# EAGLE board Micro_Bit_Moto_Bit_Panel_v10 (EAGLE 7.5.0), part 1 of 2
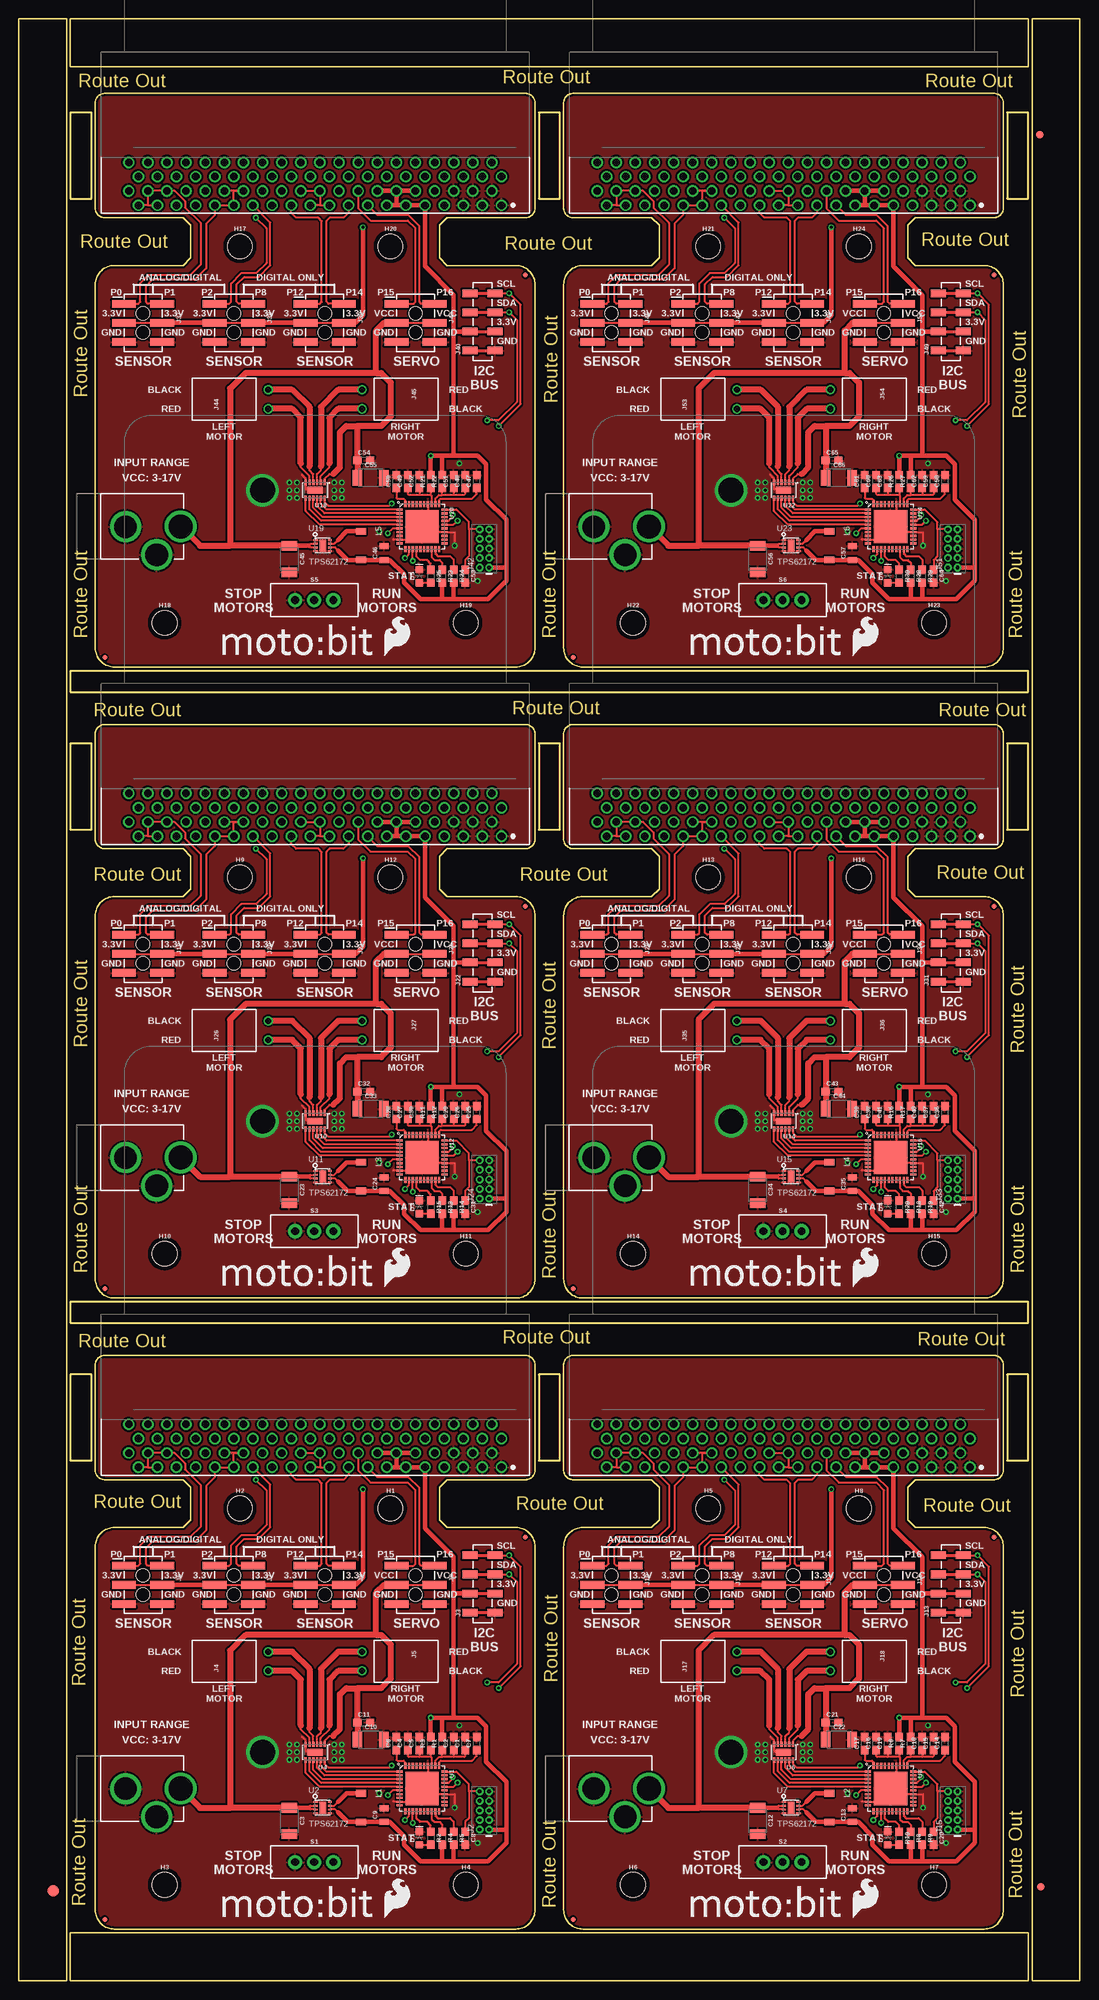
[diagram p0: board, top side]
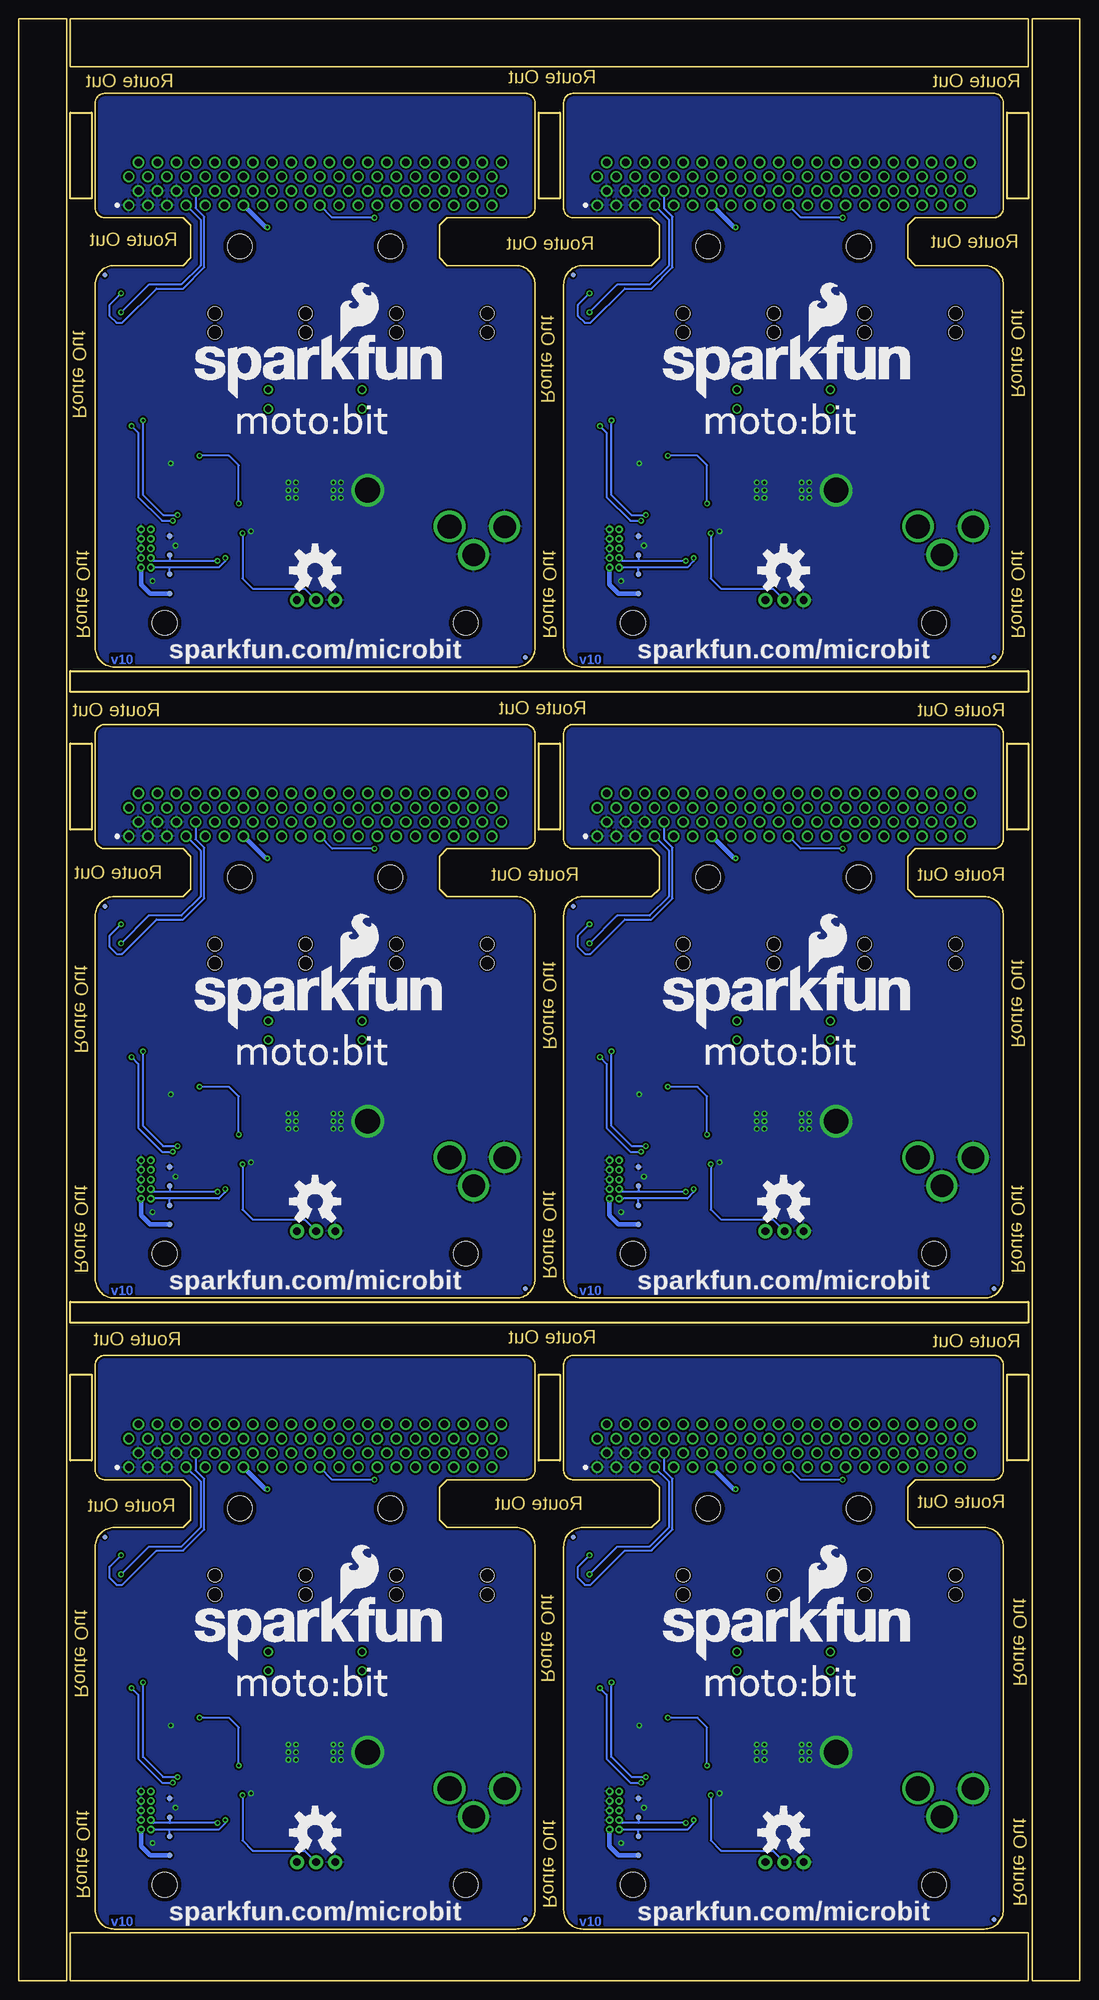
[diagram p1: board, bottom side, seen from below]

Size 140.97 x 260.6 mm. Coordinates in mm from the lower left corner, seen from the top.
Outline: 6.35,124.97 6.35,0 0,0 0,75.44
Outline: 0,72.9 0,260.6 6.35,260.6 6.35,122.43
Outline: 81.28,0 6.86,0 6.86,6.35 31.75,6.35
Outline: 29.21,6.35 134.11,6.35 134.11,0 78.74,0
Outline: 140.97,117.09 140.97,0 134.62,0 134.62,67.56
Outline: 134.62,65.02 134.62,260.6 140.97,260.6 140.97,114.55
Outline: 27.18,260.6 134.11,260.6 134.11,254.25 76.71,254.25
Outline: 79.25,254.25 6.86,254.25 6.86,260.6 29.72,260.6
Outline: 12.7,6.86 66.04,6.86 arc90 68.58,9.4 68.58,57.66 arc90 66.04,60.2 56.9,60.2 55.88,61.21 55.88,65.53 56.9,66.55 67.31,66.55 arc90 68.58,67.82 68.58,81.79 arc90 67.31,83.06 11.43,83.06 arc90 10.16,81.79 10.16,67.82 arc90 11.43,66.55 21.84,66.55 22.86,65.53 22.86,61.21 21.84,60.2 12.7,60.2 arc90 10.16,57.66 10.16,9.4 arc90 12.7,6.86
Outline: 74.93,6.86 128.27,6.86 arc90 130.81,9.4 130.81,57.66 arc90 128.27,60.2 119.13,60.2 118.11,61.21 118.11,65.53 119.13,66.55 129.54,66.55 arc90 130.81,67.82 130.81,81.79 arc90 129.54,83.06 73.66,83.06 arc90 72.39,81.79 72.39,67.82 arc90 73.66,66.55 84.07,66.55 85.09,65.53 85.09,61.21 84.07,60.2 74.93,60.2 arc90 72.39,57.66 72.39,9.4 arc90 74.93,6.86
Outline: 69.09,69.09 71.88,69.09 71.88,80.52 69.09,80.52 69.09,69.09
Outline: 131.32,69.09 134.11,69.09 134.11,80.52 131.32,80.52 131.32,69.09
Outline: 6.86,69.09 9.65,69.09 9.65,80.52 6.86,80.52 6.86,69.09
Outline: 6.86,90.17 6.86,87.38 134.11,87.38 134.11,90.17 6.86,90.17
Outline: 12.7,90.68 66.04,90.68 arc90 68.58,93.22 68.58,141.48 arc90 66.04,144.02 56.9,144.02 55.88,145.03 55.88,149.35 56.9,150.37 67.31,150.37 arc90 68.58,151.64 68.58,165.61 arc90 67.31,166.88 11.43,166.88 arc90 10.16,165.61 10.16,151.64 arc90 11.43,150.37 21.84,150.37 22.86,149.35 22.86,145.03 21.84,144.02 12.7,144.02 arc90 10.16,141.48 10.16,93.22 arc90 12.7,90.68
Outline: 74.93,90.68 128.27,90.68 arc90 130.81,93.22 130.81,141.48 arc90 128.27,144.02 119.13,144.02 118.11,145.03 118.11,149.35 119.13,150.37 129.54,150.37 arc90 130.81,151.64 130.81,165.61 arc90 129.54,166.88 73.66,166.88 arc90 72.39,165.61 72.39,151.64 arc90 73.66,150.37 84.07,150.37 85.09,149.35 85.09,145.03 84.07,144.02 74.93,144.02 arc90 72.39,141.48 72.39,93.22 arc90 74.93,90.68
Outline: 69.09,152.91 71.88,152.91 71.88,164.34 69.09,164.34 69.09,152.91
Outline: 131.32,152.91 134.11,152.91 134.11,164.34 131.32,164.34 131.32,152.91
Outline: 6.86,152.91 9.65,152.91 9.65,164.34 6.86,164.34 6.86,152.91
Outline: 6.86,173.99 6.86,171.2 134.11,171.2 134.11,173.99 6.86,173.99
Outline: 12.7,174.5 66.04,174.5 arc90 68.58,177.04 68.58,225.3 arc90 66.04,227.84 56.9,227.84 55.88,228.85 55.88,233.17 56.9,234.19 67.31,234.19 arc90 68.58,235.46 68.58,249.43 arc90 67.31,250.7 11.43,250.7 arc90 10.16,249.43 10.16,235.46 arc90 11.43,234.19 21.84,234.19 22.86,233.17 22.86,228.85 21.84,227.84 12.7,227.84 arc90 10.16,225.3 10.16,177.04 arc90 12.7,174.5
Outline: 74.93,174.5 128.27,174.5 arc90 130.81,177.04 130.81,225.3 arc90 128.27,227.84 119.13,227.84 118.11,228.85 118.11,233.17 119.13,234.19 129.54,234.19 arc90 130.81,235.46 130.81,249.43 arc90 129.54,250.7 73.66,250.7 arc90 72.39,249.43 72.39,235.46 arc90 73.66,234.19 84.07,234.19 85.09,233.17 85.09,228.85 84.07,227.84 74.93,227.84 arc90 72.39,225.3 72.39,177.04 arc90 74.93,174.5
Outline: 69.09,236.73 71.88,236.73 71.88,248.16 69.09,248.16 69.09,236.73
Outline: 131.32,236.73 134.11,236.73 134.11,248.16 131.32,248.16 131.32,236.73
Outline: 6.86,236.73 9.65,236.73 9.65,248.16 6.86,248.16 6.86,236.73
Copper layers (1*16): Top 0.035mm / dielectric 1.5mm / Bottom 0.035mm
Design rules "SparkFun-2-layer-TIGHT": minimum track width 7mil, minimum drill 15mil, track to track 7mil, track to pad 7mil, pad to pad 7mil, via to via 7mil, smd to smd 7mil, copper to edge 7mil, drill to drill 7mil, minimum pad ring 7mil, minimum via ring 7mil, stop-mask expansion 4mil, vias tented up to drill 25mil, thermal gap 10mil

## Footprints (pad centres in the part's own frame; a part is rotated, then mirrored left to right if it is on the bottom)
0603 = smd 1.1 x 1: 1 -0.85,0; 2 0.85,0
1210 = smd 1.27 x 2.06: 1 -1.755,0; 2 1.755,0
0805 = smd 0.8 x 1.2: 1 -0.9,0; 2 0.9,0
LED-0603 = smd 1 x 1: A -0.877,0; C 0.877,0
FIDUCIAL-1.5X3 = smd 1.5 x 1.5: 1 0,0
FIDUCIAL-1X2 = smd 1 x 1: 1 0,0
FIDUCIAL-MICRO = smd 0.635 x 0.635: 1 0,0
STAND-OFF = hole 3.302: 0,0
POWER_JACK_PTH_LOCK = drill 2.997 pad 4.115: GND 0.025,6.557; GNDBREAK 3.762,10.7 | drill 3.2 pad 4.115: PWR 0,13.878
2X5-PTH-1.27MM = drill 0.508 pad 1: 1 -2.54,-0.635; 2 -2.54,0.635; 3 -1.27,-0.635; 4 -1.27,0.635; 5 0,-0.635; 6 0,0.635; 7 1.27,-0.635; 8 1.27,0.635; 9 2.54,-0.635; 10 2.54,0.635
1X04_SMD_VERTICAL_COMBO = smd 1 x 2: 1 0,-1.65; 1-2 0,1.65; 2 2.54,1.65; 2-2 2.54,-1.65; 3 5.08,-1.65; 3-2 5.08,1.65; 4 7.62,1.65; 4-2 7.62,-1.65
1X02_RA_FEMALE = drill 0.8: 1 1.27,-5.85; 2 -1.27,-5.85
2X3_SMT_POSTS = smd 1 x 3.17: 1 -2.54,-2.54; 2 -2.54,2.54; 3 0,-2.54; 4 0,2.54; 5 2.54,-2.54; 6 2.54,2.54 | hole 1.8: -1.27,0; 1.27,0
INDUCTOR_2.2UH = smd 0.9 x 1.3: P$1 -1.9,0; P$2 1.9,0
SWITCH_SPDT_PTH_11.6X4.0MM = drill 1.016 pad 1.88: 1 0,2.54; 2 0,0; 3 0,-2.54
PAD.03X.03 = smd 0.762 x 0.762: P$1 0,0
QFN-40 = smd 0.285 x 0.8: 1 -2.25,-3; 2 -1.75,-3; 3 -1.25,-3; 4 -0.75,-3; 5 -0.25,-3; 6 0.25,-3; 7 0.75,-3; 8 1.25,-3; 9 1.75,-3; 10 2.25,-3; 21 2.25,3; 22 1.75,3; 23 1.25,3; 24 0.75,3; 25 0.25,3; 26 -0.25,3; 27 -0.75,3; 28 -1.25,3; 29 -1.75,3; 30 -2.25,3 | smd 0.8 x 0.285: 11 3,-2.25; 12 3,-1.75; 13 3,-1.25; 14 3,-0.75; 15 3,-0.25; 16 3,0.25; 17 3,0.75; 18 3,1.25; 19 3,1.75; 20 3,2.25; 31 -3,2.25; 32 -3,1.75; 33 -3,1.25; 34 -3,0.75; 35 -3,0.25; 36 -3,-0.25; 37 -3,-0.75; 38 -3,-1.25; 39 -3,-1.75; 40 -3,-2.25 | smd 4.4 x 4.4: EP 0,0
WSON-8-PAD = smd 0.25 x 0.5: 1 -0.75,-0.95; 2 -0.25,-0.95; 3 0.25,-0.95; 4 0.75,-0.95; 5 0.75,0.95; 6 0.25,0.95; 7 -0.25,0.95; 8 -0.75,0.95 | smd 1.6 x 0.9: PAD 0,0
MICRO:BIT_RA_PTH = drill 1: A1 -24.765,7.62; A2 -23.495,5.72; A3 -22.225,7.62; A4 -20.955,5.72; A5 -19.685,7.62; A6 -18.415,5.72; A7 -17.145,7.62; A8 -15.875,5.72; A9 -14.605,7.62; A10 -13.335,5.72; A11 -12.065,7.62; A12 -10.795,5.72; A13 -9.525,7.62; A14 -8.255,5.72; A15 -6.985,7.62; A16 -5.715,5.72; A17 -4.445,7.62; A18 -3.175,5.72; A19 -1.905,7.62; A20 -0.635,5.72; A21 0.635,7.62; A22 1.905,5.72; A23 3.175,7.62; A24 4.445,5.72; A25 5.715,7.62; A26 6.985,5.72; A27 8.255,7.62; A28 9.525,5.72; A29 10.795,7.62; A30 12.065,5.72; A31 13.335,7.62; A32 14.605,5.72; A33 15.875,7.62; A34 17.145,5.72; A35 18.415,7.62; A36 19.685,5.72; A37 20.955,7.62; A38 22.225,5.72; A39 23.495,7.62; A40 24.765,5.72; B1 -24.765,3.82; B2 -23.495,1.92; B3 -22.225,3.82; B4 -20.955,1.92; B5 -19.685,3.82; B6 -18.415,1.92; B7 -17.145,3.82; B8 -15.875,1.92; B9 -14.605,3.82; B10 -13.335,1.92; B11 -12.065,3.82; B12 -10.795,1.92; B13 -9.525,3.82; B14 -8.255,1.92; B15 -6.985,3.82; B16 -5.715,1.92; B17 -4.445,3.82; B18 -3.175,1.92; B19 -1.905,3.82; B20 -0.635,1.92; B21 0.635,3.82; B22 1.905,1.92; B23 3.175,3.82; B24 4.445,1.92; B25 5.715,3.82; B26 6.985,1.92; B27 8.255,3.82; B28 9.525,1.92; B29 10.795,3.82; B30 12.065,1.92; B31 13.335,3.82; B32 14.605,1.92; B33 15.875,3.82; B34 17.145,1.92; B35 18.415,3.82; B36 19.685,1.92; B37 20.955,3.82; B38 22.225,1.92; B39 23.495,3.82; B40 24.765,1.92
WSON-12 = smd 0.3 x 0.7: 1 -1.25,-1.05; 2 -0.75,-1.05; 3 -0.25,-1.05; 4 0.25,-1.05; 5 0.75,-1.05; 6 1.25,-1.05; 7 1.25,1.05; 8 0.75,1.05; 9 0.25,1.05; 10 -0.25,1.05; 11 -0.75,1.05; 12 -1.25,1.05 | smd 2 x 0.9: PAD 0,0

## Placement (x,y rotation side)
C1  1.0uF  [0603]  59.31,31.5 90 top
C2  0.1uF  [0603]  57.78,31.5 90 top
C3  10uF  [1210]  35.94,21.21 270 top
C4  1.0uF  [0603]  51.69,31.5 90 top
C5  0.1uF  [0603]  53.21,31.5 90 top
C6  0.1uF  [0603]  50.16,31.5 90 top
C7  1.0uF  [0603]  60.83,31.5 90 top
C8  0.1uF  [0603]  59.31,18.92 270 top
C9  22uF  [0805]  48.51,21.99 90 top
C10  10uF  [1210]  46.74,32 0 top
C11  0.1uF  [0603]  45.82,34.29 0 top
C12  10uF  [1210]  98.17,21.21 270 top
C13  22uF  [0805]  110.74,21.99 90 top
C14  1.0uF  [0603]  123.06,31.5 90 top
C15  1.0uF  [0603]  121.54,31.5 90 top
C16  1.0uF  [0603]  113.92,31.5 90 top
C17  0.1uF  [0603]  112.39,31.5 90 top
C18  0.1uF  [0603]  120.02,31.5 90 top
C19  0.1uF  [0603]  115.44,31.5 90 top
C20  0.1uF  [0603]  121.54,18.92 270 top
C21  0.1uF  [0603]  108.05,34.29 0 top
C22  10uF  [1210]  108.97,32 0 top
C23  10uF  [1210]  35.94,105.03 270 top
C24  22uF  [0805]  48.51,105.81 90 top
C25  1.0uF  [0603]  60.83,115.32 90 top
C26  1.0uF  [0603]  59.31,115.32 90 top
C27  1.0uF  [0603]  51.69,115.32 90 top
C28  0.1uF  [0603]  50.16,115.32 90 top
C29  0.1uF  [0603]  57.78,115.32 90 top
C30  0.1uF  [0603]  53.21,115.32 90 top
C31  0.1uF  [0603]  59.31,102.74 270 top
C32  0.1uF  [0603]  45.82,118.11 0 top
C33  10uF  [1210]  46.74,115.82 0 top
C34  10uF  [1210]  98.17,105.03 270 top
C35  22uF  [0805]  110.74,105.81 90 top
C36  1.0uF  [0603]  123.06,115.32 90 top
C37  1.0uF  [0603]  121.54,115.32 90 top
C38  1.0uF  [0603]  113.92,115.32 90 top
C39  0.1uF  [0603]  112.39,115.32 90 top
C40  0.1uF  [0603]  120.02,115.32 90 top
C41  0.1uF  [0603]  115.44,115.32 90 top
C42  0.1uF  [0603]  121.54,102.74 270 top
C43  0.1uF  [0603]  108.05,118.11 0 top
C44  10uF  [1210]  108.97,115.82 0 top
C45  10uF  [1210]  35.94,188.85 270 top
C46  22uF  [0805]  48.51,189.63 90 top
C47  1.0uF  [0603]  60.83,199.14 90 top
C48  1.0uF  [0603]  59.31,199.14 90 top
C49  1.0uF  [0603]  51.69,199.14 90 top
C50  0.1uF  [0603]  50.16,199.14 90 top
C51  0.1uF  [0603]  57.78,199.14 90 top
C52  0.1uF  [0603]  53.21,199.14 90 top
C53  0.1uF  [0603]  59.31,186.56 270 top
C54  0.1uF  [0603]  45.82,201.93 0 top
C55  10uF  [1210]  46.74,199.64 0 top
C56  10uF  [1210]  98.17,188.85 270 top
C57  22uF  [0805]  110.74,189.63 90 top
C58  1.0uF  [0603]  123.06,199.14 90 top
C59  1.0uF  [0603]  121.54,199.14 90 top
C60  1.0uF  [0603]  113.92,199.14 90 top
C61  0.1uF  [0603]  112.39,199.14 90 top
C62  0.1uF  [0603]  120.02,199.14 90 top
C63  0.1uF  [0603]  115.44,199.14 90 top
C64  0.1uF  [0603]  121.54,186.56 270 top
C65  0.1uF  [0603]  108.05,201.93 0 top
C66  10uF  [1210]  108.97,199.64 0 top
D1  RED  [LED-0603]  53.21,18.92 90 top
D2  RED  [LED-0603]  115.44,18.92 90 top
D3  RED  [LED-0603]  53.21,102.74 90 top
D4  RED  [LED-0603]  115.44,102.74 90 top
D5  RED  [LED-0603]  53.21,186.56 90 top
D6  RED  [LED-0603]  115.44,186.56 90 top
E$1  [FIDUCIAL-1.5X3]  4.57,11.94 0 top
E$5  [FIDUCIAL-1X2]  135.76,12.45 0 top
E$7  [FIDUCIAL-1X2]  135.64,245.24 90 top
FD1  FIDUCIALUFIDUCIAL  [FIDUCIAL-MICRO]  11.43,8.13 0 top
FD2  FIDUCIALUFIDUCIAL  [FIDUCIAL-MICRO]  67.31,58.93 0 top
FD3  FIDUCIALUFIDUCIAL  [FIDUCIAL-MICRO]  11.43,8.13 0 bottom
FD4  FIDUCIALUFIDUCIAL  [FIDUCIAL-MICRO]  67.31,58.93 0 bottom
FD5  FIDUCIALUFIDUCIAL  [FIDUCIAL-MICRO]  73.66,8.13 0 top
FD6  FIDUCIALUFIDUCIAL  [FIDUCIAL-MICRO]  129.54,58.93 0 top
FD7  FIDUCIALUFIDUCIAL  [FIDUCIAL-MICRO]  73.66,8.13 0 bottom
FD8  FIDUCIALUFIDUCIAL  [FIDUCIAL-MICRO]  129.54,58.93 0 bottom
FD9  FIDUCIALUFIDUCIAL  [FIDUCIAL-MICRO]  11.43,91.95 0 top
FD10  FIDUCIALUFIDUCIAL  [FIDUCIAL-MICRO]  67.31,142.75 0 top
FD11  FIDUCIALUFIDUCIAL  [FIDUCIAL-MICRO]  11.43,91.95 0 bottom
FD12  FIDUCIALUFIDUCIAL  [FIDUCIAL-MICRO]  67.31,142.75 0 bottom
FD13  FIDUCIALUFIDUCIAL  [FIDUCIAL-MICRO]  73.66,91.95 0 top
FD14  FIDUCIALUFIDUCIAL  [FIDUCIAL-MICRO]  129.54,142.75 0 top
FD15  FIDUCIALUFIDUCIAL  [FIDUCIAL-MICRO]  73.66,91.95 0 bottom
FD16  FIDUCIALUFIDUCIAL  [FIDUCIAL-MICRO]  129.54,142.75 0 bottom
FD17  FIDUCIALUFIDUCIAL  [FIDUCIAL-MICRO]  11.43,175.77 0 top
FD18  FIDUCIALUFIDUCIAL  [FIDUCIAL-MICRO]  67.31,226.57 0 top
FD19  FIDUCIALUFIDUCIAL  [FIDUCIAL-MICRO]  11.43,175.77 0 bottom
FD20  FIDUCIALUFIDUCIAL  [FIDUCIAL-MICRO]  67.31,226.57 0 bottom
FD21  FIDUCIALUFIDUCIAL  [FIDUCIAL-MICRO]  73.66,175.77 0 top
FD22  FIDUCIALUFIDUCIAL  [FIDUCIAL-MICRO]  129.54,226.57 0 top
FD23  FIDUCIALUFIDUCIAL  [FIDUCIAL-MICRO]  73.66,175.77 0 bottom
FD24  FIDUCIALUFIDUCIAL  [FIDUCIAL-MICRO]  129.54,226.57 0 bottom
H1  STAND-OFF  [STAND-OFF]  49.37,62.74 0 top
H2  STAND-OFF  [STAND-OFF]  29.37,62.74 0 top
H3  STAND-OFF  [STAND-OFF]  19.37,12.74 0 top
H4  STAND-OFF  [STAND-OFF]  59.37,12.74 0 top
H5  STAND-OFF  [STAND-OFF]  91.6,62.74 0 top
H6  STAND-OFF  [STAND-OFF]  81.6,12.74 0 top
H7  STAND-OFF  [STAND-OFF]  121.6,12.74 0 top
H8  STAND-OFF  [STAND-OFF]  111.6,62.74 0 top
H9  STAND-OFF  [STAND-OFF]  29.37,146.56 0 top
H10  STAND-OFF  [STAND-OFF]  19.37,96.56 0 top
H11  STAND-OFF  [STAND-OFF]  59.37,96.56 0 top
H12  STAND-OFF  [STAND-OFF]  49.37,146.56 0 top
H13  STAND-OFF  [STAND-OFF]  91.6,146.56 0 top
H14  STAND-OFF  [STAND-OFF]  81.6,96.56 0 top
H15  STAND-OFF  [STAND-OFF]  121.6,96.56 0 top
H16  STAND-OFF  [STAND-OFF]  111.6,146.56 0 top
H17  STAND-OFF  [STAND-OFF]  29.37,230.38 0 top
H18  STAND-OFF  [STAND-OFF]  19.37,180.38 0 top
H19  STAND-OFF  [STAND-OFF]  59.37,180.38 0 top
H20  STAND-OFF  [STAND-OFF]  49.37,230.38 0 top
H21  STAND-OFF  [STAND-OFF]  91.6,230.38 0 top
H22  STAND-OFF  [STAND-OFF]  81.6,180.38 0 top
H23  STAND-OFF  [STAND-OFF]  121.6,180.38 0 top
H24  STAND-OFF  [STAND-OFF]  111.6,230.38 0 top
J1  POWER_JACKPTH_LOCK  [POWER_JACK_PTH_LOCK]  7.62,25.53 270 top
J2  CORTEX_DEBUGPTH  [2X5-PTH-1.27MM]  61.85,22.61 90 top
J3  [1X04_SMD_VERTICAL_COMBO]  61.59,48.9 90 top
J4  [1X02_RA_FEMALE]  27.3,42.42 90 top
J5  [1X02_RA_FEMALE]  51.44,42.42 270 top
J6  [2X3_SMT_POSTS]  16.51,52.58 270 top
J7  [2X3_SMT_POSTS]  28.57,52.58 270 top
J8  [2X3_SMT_POSTS]  40.64,52.58 270 top
J9  [2X3_SMT_POSTS]  52.7,52.58 270 top
J10  [2X3_SMT_POSTS]  78.74,52.58 270 top
J11  [2X3_SMT_POSTS]  90.81,52.58 270 top
J12  [2X3_SMT_POSTS]  102.87,52.58 270 top
J13  [1X04_SMD_VERTICAL_COMBO]  123.83,48.9 90 top
J14  POWER_JACKPTH_LOCK  [POWER_JACK_PTH_LOCK]  69.85,25.53 270 top
J15  CORTEX_DEBUGPTH  [2X5-PTH-1.27MM]  124.08,22.61 90 top
J16  [2X3_SMT_POSTS]  114.94,52.58 270 top
J17  [1X02_RA_FEMALE]  89.53,42.42 90 top
J18  [1X02_RA_FEMALE]  113.67,42.42 270 top
J19  [2X3_SMT_POSTS]  16.51,136.4 270 top
J20  [2X3_SMT_POSTS]  28.57,136.4 270 top
J21  [2X3_SMT_POSTS]  40.64,136.4 270 top
J22  [1X04_SMD_VERTICAL_COMBO]  61.59,132.72 90 top
J23  POWER_JACKPTH_LOCK  [POWER_JACK_PTH_LOCK]  7.62,109.35 270 top
J24  CORTEX_DEBUGPTH  [2X5-PTH-1.27MM]  61.85,106.43 90 top
J25  [2X3_SMT_POSTS]  52.7,136.4 270 top
J26  [1X02_RA_FEMALE]  27.3,126.24 90 top
J27  [1X02_RA_FEMALE]  51.44,126.24 270 top
J28  [2X3_SMT_POSTS]  78.74,136.4 270 top
J29  [2X3_SMT_POSTS]  90.81,136.4 270 top
J30  [2X3_SMT_POSTS]  102.87,136.4 270 top
J31  [1X04_SMD_VERTICAL_COMBO]  123.83,132.72 90 top
J32  POWER_JACKPTH_LOCK  [POWER_JACK_PTH_LOCK]  69.85,109.35 270 top
J33  CORTEX_DEBUGPTH  [2X5-PTH-1.27MM]  124.08,106.43 90 top
J34  [2X3_SMT_POSTS]  114.94,136.4 270 top
J35  [1X02_RA_FEMALE]  89.53,126.24 90 top
J36  [1X02_RA_FEMALE]  113.67,126.24 270 top
J37  [2X3_SMT_POSTS]  16.51,220.22 270 top
J38  [2X3_SMT_POSTS]  28.57,220.22 270 top
J39  [2X3_SMT_POSTS]  40.64,220.22 270 top
J40  [1X04_SMD_VERTICAL_COMBO]  61.59,216.53 90 top
J41  POWER_JACKPTH_LOCK  [POWER_JACK_PTH_LOCK]  7.62,193.17 270 top
J42  CORTEX_DEBUGPTH  [2X5-PTH-1.27MM]  61.85,190.25 90 top
J43  [2X3_SMT_POSTS]  52.7,220.22 270 top
J44  [1X02_RA_FEMALE]  27.3,210.06 90 top
J45  [1X02_RA_FEMALE]  51.44,210.06 270 top
J46  [2X3_SMT_POSTS]  78.74,220.22 270 top
J47  [2X3_SMT_POSTS]  90.81,220.22 270 top
J48  [2X3_SMT_POSTS]  102.87,220.22 270 top
J49  [1X04_SMD_VERTICAL_COMBO]  123.83,216.53 90 top
J50  POWER_JACKPTH_LOCK  [POWER_JACK_PTH_LOCK]  69.85,193.17 270 top
J51  CORTEX_DEBUGPTH  [2X5-PTH-1.27MM]  124.08,190.25 90 top
J52  [2X3_SMT_POSTS]  114.94,220.22 270 top
J53  [1X02_RA_FEMALE]  89.53,210.06 90 top
J54  [1X02_RA_FEMALE]  113.67,210.06 270 top
L1  2.2µH  [INDUCTOR_2.2UH]  45.47,22.99 270 top
L2  2.2µH  [INDUCTOR_2.2UH]  107.7,22.99 270 top
L3  2.2µH  [INDUCTOR_2.2UH]  45.47,106.81 270 top
L4  2.2µH  [INDUCTOR_2.2UH]  107.7,106.81 270 top
L5  2.2µH  [INDUCTOR_2.2UH]  45.47,190.63 270 top
L6  2.2µH  [INDUCTOR_2.2UH]  107.7,190.63 270 top
LOGO1  SFE_LOGO_NAME_FLAME.3_INCH  [SFE_LOGO_NAME_FLAME_.3]  55.88,42.42 0 bottom
LOGO2  OSHW-LOGOL  [OSHW-LOGO-L]  39.37,19.68 0 bottom
LOGO3  SFE_LOGO_NAME_FLAME.3_INCH  [SFE_LOGO_NAME_FLAME_.3]  118.11,42.42 0 bottom
LOGO4  OSHW-LOGOL  [OSHW-LOGO-L]  101.6,19.68 0 bottom
LOGO5  SFE_LOGO_NAME_FLAME.3_INCH  [SFE_LOGO_NAME_FLAME_.3]  55.88,126.24 0 bottom
LOGO6  OSHW-LOGOL  [OSHW-LOGO-L]  39.37,103.5 0 bottom
LOGO7  SFE_LOGO_NAME_FLAME.3_INCH  [SFE_LOGO_NAME_FLAME_.3]  118.11,126.24 0 bottom
LOGO8  OSHW-LOGOL  [OSHW-LOGO-L]  101.6,103.5 0 bottom
LOGO9  SFE_LOGO_NAME_FLAME.3_INCH  [SFE_LOGO_NAME_FLAME_.3]  55.88,210.06 0 bottom
LOGO10  OSHW-LOGOL  [OSHW-LOGO-L]  39.37,187.32 0 bottom
LOGO11  SFE_LOGO_NAME_FLAME.3_INCH  [SFE_LOGO_NAME_FLAME_.3]  118.11,210.06 0 bottom
LOGO12  OSHW-LOGOL  [OSHW-LOGO-L]  101.6,187.32 0 bottom
R1  1  [0603]  56.26,31.5 90 top
R2  470  [0603]  54.74,18.92 270 top
R3  1  [0603]  54.74,31.5 90 top
R4  4.7k  [0603]  56.26,18.92 270 top
R5  4.7k  [0603]  57.78,18.92 270 top
R6  1  [0603]  116.97,31.5 90 top
R7  1  [0603]  118.49,31.5 90 top
R8  4.7k  [0603]  118.49,18.92 270 top
R9  4.7k  [0603]  120.02,18.92 270 top
R10  470  [0603]  116.97,18.92 270 top
R11  1  [0603]  54.74,115.32 90 top
R12  1  [0603]  56.26,115.32 90 top
R13  4.7k  [0603]  56.26,102.74 270 top
R14  4.7k  [0603]  57.78,102.74 270 top
R15  470  [0603]  54.74,102.74 270 top
R16  1  [0603]  116.97,115.32 90 top
R17  1  [0603]  118.49,115.32 90 top
R18  4.7k  [0603]  118.49,102.74 270 top
R19  4.7k  [0603]  120.02,102.74 270 top
R20  470  [0603]  116.97,102.74 270 top
R21  1  [0603]  54.74,199.14 90 top
R22  1  [0603]  56.26,199.14 90 top
R23  4.7k  [0603]  56.26,186.56 270 top
R24  4.7k  [0603]  57.78,186.56 270 top
R25  470  [0603]  54.74,186.56 270 top
R26  1  [0603]  116.97,199.14 90 top
R27  1  [0603]  118.49,199.14 90 top
R28  4.7k  [0603]  118.49,186.56 270 top
R29  4.7k  [0603]  120.02,186.56 270 top
R30  470  [0603]  116.97,186.56 270 top
S1  [SWITCH_SPDT_PTH_11.6X4.0MM]  39.24,15.75 270 top
S2  [SWITCH_SPDT_PTH_11.6X4.0MM]  101.47,15.75 270 top
S3  [SWITCH_SPDT_PTH_11.6X4.0MM]  39.24,99.57 270 top
S4  [SWITCH_SPDT_PTH_11.6X4.0MM]  101.47,99.57 270 top
S5  [SWITCH_SPDT_PTH_11.6X4.0MM]  39.24,183.39 270 top
S6  [SWITCH_SPDT_PTH_11.6X4.0MM]  101.47,183.39 270 top
TP1  [PAD.03X.03]  58.67,19.18 270 bottom
TP2  [PAD.03X.03]  58.67,21.72 270 bottom
TP3  [PAD.03X.03]  58.67,16.64 270 bottom
TP4  [PAD.03X.03]  58.67,24.26 270 bottom
TP5  [PAD.03X.03]  120.9,19.18 270 bottom
TP6  [PAD.03X.03]  120.9,21.72 270 bottom
TP7  [PAD.03X.03]  120.9,16.64 270 bottom
TP8  [PAD.03X.03]  120.9,24.26 270 bottom
TP9  [PAD.03X.03]  58.67,103 270 bottom
TP10  [PAD.03X.03]  58.67,105.54 270 bottom
TP11  [PAD.03X.03]  58.67,100.46 270 bottom
TP12  [PAD.03X.03]  58.67,108.08 270 bottom
TP13  [PAD.03X.03]  120.9,103 270 bottom
TP14  [PAD.03X.03]  120.9,105.54 270 bottom
TP15  [PAD.03X.03]  120.9,100.46 270 bottom
TP16  [PAD.03X.03]  120.9,108.08 270 bottom
TP17  [PAD.03X.03]  58.67,186.82 270 bottom
TP18  [PAD.03X.03]  58.67,189.36 270 bottom
TP19  [PAD.03X.03]  58.67,184.28 270 bottom
TP20  [PAD.03X.03]  58.67,191.9 270 bottom
TP21  [PAD.03X.03]  120.9,186.82 270 bottom
TP22  [PAD.03X.03]  120.9,189.36 270 bottom
TP23  [PAD.03X.03]  120.9,184.28 270 bottom
TP24  [PAD.03X.03]  120.9,191.9 270 bottom
U1  CY8C4245LQI-483  [QFN-40]  53.59,25.53 270 top
U2  TPS62172  [WSON-8-PAD]  40.39,22.99 270 top
U3  micro:bit  [MICRO:BIT_RA_PTH]  39.37,75.82 180 top
U4  DRV8835  [WSON-12]  39.37,30.35 180 top
U5  micro:bit  [MICRO:BIT_RA_PTH]  101.6,75.82 180 top
U6  DRV8835  [WSON-12]  101.6,30.35 180 top
U7  TPS62172  [WSON-8-PAD]  102.62,22.99 270 top
U8  CY8C4245LQI-483  [QFN-40]  115.82,25.53 270 top
U9  micro:bit  [MICRO:BIT_RA_PTH]  39.37,159.64 180 top
U10  DRV8835  [WSON-12]  39.37,114.17 180 top
U11  TPS62172  [WSON-8-PAD]  40.39,106.81 270 top
U12  CY8C4245LQI-483  [QFN-40]  53.59,109.35 270 top
U13  micro:bit  [MICRO:BIT_RA_PTH]  101.6,159.64 180 top
U14  DRV8835  [WSON-12]  101.6,114.17 180 top
U15  TPS62172  [WSON-8-PAD]  102.62,106.81 270 top
U16  CY8C4245LQI-483  [QFN-40]  115.82,109.35 270 top
U17  micro:bit  [MICRO:BIT_RA_PTH]  39.37,243.46 180 top
U18  DRV8835  [WSON-12]  39.37,197.99 180 top
U19  TPS62172  [WSON-8-PAD]  40.39,190.63 270 top
U20  CY8C4245LQI-483  [QFN-40]  53.59,193.17 270 top
U21  micro:bit  [MICRO:BIT_RA_PTH]  101.6,243.46 180 top
U22  DRV8835  [WSON-12]  101.6,197.99 180 top
U23  TPS62172  [WSON-8-PAD]  102.62,190.63 270 top
U24  CY8C4245LQI-483  [QFN-40]  115.82,193.17 270 top
U$2  [SFE_LOGO_FLAME_.2]  48.26,8.13 0 top
U$3  [LOGO-MOTOBIT]  26.92,8.13 0 top
U$4  [LOGO-MOTOBIT]  49.78,37.47 0 bottom
U$5  [SFE_LOGO_FLAME_.2]  110.49,8.13 0 top
U$6  [LOGO-MOTOBIT]  89.15,8.13 0 top
U$7  [LOGO-MOTOBIT]  112.01,37.47 0 bottom
U$8  [SFE_LOGO_FLAME_.2]  48.26,91.95 0 top
U$9  [LOGO-MOTOBIT]  26.92,91.95 0 top
U$10  [LOGO-MOTOBIT]  49.78,121.28 0 bottom
U$11  [SFE_LOGO_FLAME_.2]  110.49,91.95 0 top
U$12  [LOGO-MOTOBIT]  89.15,91.95 0 top
U$13  [LOGO-MOTOBIT]  112.01,121.28 0 bottom
U$14  [SFE_LOGO_FLAME_.2]  48.26,175.77 0 top
U$15  [LOGO-MOTOBIT]  26.92,175.77 0 top
U$16  [LOGO-MOTOBIT]  49.78,205.1 0 bottom
U$17  [SFE_LOGO_FLAME_.2]  110.49,175.77 0 top
U$18  [LOGO-MOTOBIT]  89.15,175.77 0 top
U$19  [LOGO-MOTOBIT]  112.01,205.1 0 bottom

## Library data of the parts
C1 C4 C7 C14-C16 C25-C27 C36-C38 C47-C49 C58-C60 = SparkFun-Capacitors; PROD_ID: CAP-00868
C2 C5 C6 C8 C11 C17-C21 C28-C32 C39-C43 C50-C54 C61-C65 = SparkFun-Capacitors; PROD_ID: CAP-00810
C3 C10 C12 C22 C23 C33 C34 C44 C45 C55 C56 C66 = SparkFun-Capacitors; PROD_ID: CAP-09824
C9 C13 C24 C35 C46 C57 = SparkFun-Capacitors; PROD_ID: CAP-08402
D1-D6 = SparkFun-LED; PROD_ID: DIO-00819
E$1 = SparkFun-Retired
E$5 E$7 FD1-FD24 LOGO1-LOGO12 U$2 U$5 U$8 U$11 U$14 U$17 = SparkFun-Aesthetics
H1-H24 = SparkFun-Hardware
J1 J14 J23 J32 J41 J50 = SparkFun-Connectors; PROD_ID: CONN-08197; SF_ID: PRT-00119
J2 J15 J24 J33 J42 J51 = Pete_Connectors_Retired
J3 J13 J22 J31 J40 J49 = SparkFun-Connectors; PROD_ID: CONN-08511
J4 J5 J17 J18 J26 J27 J35 J36 J44 J45 J53 J54 = SparkFun-Connectors; PROD_ID: CONN-13700
J6-J12 J16 J19-J21 J25 J28-J30 J34 J37-J39 J43 J46-J48 J52 = SparkFun-Connectors; PROD_ID: CONN-11415
L1-L6 = SparkFun-Coils; PROD_ID: NDUC-09513
R1 R3 R6 R7 R11 R12 R16 R17 R21 R22 R26 R27 = SparkFun-Resistors; PROD_ID: RES-08269
R2 R10 R15 R20 R25 R30 = SparkFun-Resistors; PROD_ID: RES-07869
R4 R5 R8 R9 R13 R14 R18 R19 R23 R24 R28 R29 = SparkFun-Resistors; PROD_ID: RES-07857
S1-S6 = SparkFun-Switches; PROD_ID: SWCH-08261; SF_SKU: COM-00102
TP1-TP24 = SparkFun-Connectors
U1 U8 U12 U16 U20 U24 = SparkFun-IC-Microcontroller; PROD_ID: IC-13292
U2 U7 U11 U15 U19 U23 = SparkFun-IC-Power; PROD_ID: IC-11307
U3 U5 U9 U13 U17 U21 = Micro_Bit_Parts; PROD_ID: CONN-13452
U4 U6 U10 U14 U18 U22 = SparkFun-IC-Special-Function; PROD_ID: IC-13342
U$3 U$4 U$6 U$7 U$9 U$10 U$12 U$13 U$15 U$16 U$18 U$19 = Micro_Bit_Parts

## Nets
3.3V: C9.1 J2.1 J3.2 J6.3 J6.4 J7.3 J7.4 J8.3 J8.4 L1.P$2 R1.2 R3.2 R4.2 R5.2 TP3.P$1 U2.6 U3.A9 U3.A10 U3.A11 U3.A12 U3.A13 U3.A14 U4.12
3.3V1: C13.1 J10.3 J10.4 J11.3 J11.4 J12.3 J12.4 J13.2 J15.1 L2.P$2 R6.2 R7.2 R8.2 R9.2 TP7.P$1 U5.A9 U5.A10 U5.A11 U5.A12 U5.A13 U5.A14 U6.12 U7.6
3.3V2: C24.1 J19.3 J19.4 J20.3 J20.4 J21.3 J21.4 J22.2 J24.1 L3.P$2 R11.2 R12.2 R13.2 R14.2 TP11.P$1 U9.A9 U9.A10 U9.A11 U9.A12 U9.A13 U9.A14 U10.12 U11.6
3.3V3: C35.1 J28.3 J28.4 J29.3 J29.4 J30.3 J30.4 J31.2 J33.1 L4.P$2 R16.2 R17.2 R18.2 R19.2 TP15.P$1 U13.A9 U13.A10 U13.A11 U13.A12 U13.A13 U13.A14 U14.12 U15.6
3.3V4: C46.1 J37.3 J37.4 J38.3 J38.4 J39.3 J39.4 J40.2 J42.1 L5.P$2 R21.2 R22.2 R23.2 R24.2 TP19.P$1 U17.A9 U17.A10 U17.A11 U17.A12 U17.A13 U17.A14 U18.12 U19.6
3.3V5: C57.1 J46.3 J46.4 J47.3 J47.4 J48.3 J48.4 J49.2 J51.1 L6.P$2 R26.2 R27.2 R28.2 R29.2 TP23.P$1 U21.A9 U21.A10 U21.A11 U21.A12 U21.A13 U21.A14 U22.12 U23.6
!RESET: C8.1 J2.10 U1.30
!RESET1: C20.1 J15.10 U8.30
!RESET2: C31.1 J24.10 U12.30
!RESET3: C42.1 J33.10 U16.30
!RESET4: C53.1 J42.10 U20.30
!RESET5: C64.1 J51.10 U24.30
ANALOG_0: J6.1 U3.A36 U3.A37 U3.A38 U3.A39
ANALOG_1: J6.2 U3.A28 U3.A29 U3.A30 U3.A31
ANALOG_2: J7.1 U3.A19 U3.A20 U3.A21 U3.A22
ANALOG_3: J11.1 U5.A19 U5.A20 U5.A21 U5.A22
ANALOG_4: J10.2 U5.A28 U5.A29 U5.A30 U5.A31
ANALOG_5: J10.1 U5.A36 U5.A37 U5.A38 U5.A39
ANALOG_6: J20.1 U9.A19 U9.A20 U9.A21 U9.A22
ANALOG_7: J19.2 U9.A28 U9.A29 U9.A30 U9.A31
ANALOG_8: J19.1 U9.A36 U9.A37 U9.A38 U9.A39
ANALOG_9: J29.1 U13.A19 U13.A20 U13.A21 U13.A22
ANALOG_10: J28.2 U13.A28 U13.A29 U13.A30 U13.A31
ANALOG_11: J28.1 U13.A36 U13.A37 U13.A38 U13.A39
ANALOG_12: J38.1 U17.A19 U17.A20 U17.A21 U17.A22
ANALOG_13: J37.2 U17.A28 U17.A29 U17.A30 U17.A31
ANALOG_14: J37.1 U17.A36 U17.A37 U17.A38 U17.A39
ANALOG_15: J47.1 U21.A19 U21.A20 U21.A21 U21.A22
ANALOG_16: J46.2 U21.A28 U21.A29 U21.A30 U21.A31
ANALOG_17: J46.1 U21.A36 U21.A37 U21.A38 U21.A39
AO1: J5.1 U4.2
AO2: J5.2 U4.3
AO3: J18.1 U6.2
AO4: J18.2 U6.3
AO5: J27.1 U10.2
AO6: J27.2 U10.3
AO7: J36.1 U14.2
AO8: J36.2 U14.3
AO9: J45.1 U18.2
AO10: J45.2 U18.3
AO11: J54.1 U22.2
AO12: J54.2 U22.3
BO1: J4.1 U4.4
BO2: J4.2 U4.5
BO3: J17.1 U6.4
BO4: J17.2 U6.5
BO5: J26.1 U10.4
BO6: J26.2 U10.5
BO7: J35.1 U14.4
BO8: J35.2 U14.5
BO9: J44.1 U18.4
BO10: J44.2 U18.5
BO11: J53.1 U22.4
BO12: J53.2 U22.5
DIGITAL_1: J11.2 U5.A27
DIGITAL_2: J12.1 U5.A23
DIGITAL_3: J12.2 U5.A17
DIGITAL_4: J20.2 U9.A27
DIGITAL_5: J21.1 U9.A23
DIGITAL_6: J21.2 U9.A17
DIGITAL_7: J29.2 U13.A27
DIGITAL_8: J7.2 U3.A27
DIGITAL_9: J30.1 U13.A23
DIGITAL_10: J30.2 U13.A17
DIGITAL_11: J38.2 U17.A27
DIGITAL_12: J8.1 U3.A23
DIGITAL_13: J39.1 U17.A23
DIGITAL_14: J8.2 U3.A17
DIGITAL_15: J39.2 U17.A17
DIGITAL_16: J47.2 U21.A27
DIGITAL_17: J48.1 U21.A23
DIGITAL_18: J48.2 U21.A17
GND: C1.2 C2.2 C3.2 C4.2 C5.2 C6.2 C7.2 C8.2 C9.2 C10.2 C11.2 D1.C J1.GND J1.GNDBREAK J2.3 J2.5 J2.7 J2.9 J3.1 J6.5 J6.6 J7.5 J7.6 J8.5 J8.6 J9.5 J9.6 S1.3 TP4.P$1 U1.9 U1.24 U1.34 U1.EP U2.1 U2.4 U2.5 U2.PAD U3.A1 U3.A2 U3.A3 U3.A4 U3.A5 U3.A6 U4.6 U4.PAD
GND1: C12.2 C13.2 C14.2 C15.2 C16.2 C17.2 C18.2 C19.2 C20.2 C21.2 C22.2 D2.C J10.5 J10.6 J11.5 J11.6 J12.5 J12.6 J13.1 J14.GND J14.GNDBREAK J15.3 J15.5 J15.7 J15.9 J16.5 J16.6 S2.3 TP8.P$1 U5.A1 U5.A2 U5.A3 U5.A4 U5.A5 U5.A6 U6.6 U6.PAD U7.1 U7.4 U7.5 U7.PAD U8.9 U8.24 U8.34 U8.EP
GND2: C23.2 C24.2 C25.2 C26.2 C27.2 C28.2 C29.2 C30.2 C31.2 C32.2 C33.2 D3.C J19.5 J19.6 J20.5 J20.6 J21.5 J21.6 J22.1 J23.GND J23.GNDBREAK J24.3 J24.5 J24.7 J24.9 J25.5 J25.6 S3.3 TP12.P$1 U9.A1 U9.A2 U9.A3 U9.A4 U9.A5 U9.A6 U10.6 U10.PAD U11.1 U11.4 U11.5 U11.PAD U12.9 U12.24 U12.34 U12.EP
GND3: C34.2 C35.2 C36.2 C37.2 C38.2 C39.2 C40.2 C41.2 C42.2 C43.2 C44.2 D4.C J28.5 J28.6 J29.5 J29.6 J30.5 J30.6 J31.1 J32.GND J32.GNDBREAK J33.3 J33.5 J33.7 J33.9 J34.5 J34.6 S4.3 TP16.P$1 U13.A1 U13.A2 U13.A3 U13.A4 U13.A5 U13.A6 U14.6 U14.PAD U15.1 U15.4 U15.5 U15.PAD U16.9 U16.24 U16.34 U16.EP
GND4: C45.2 C46.2 C47.2 C48.2 C49.2 C50.2 C51.2 C52.2 C53.2 C54.2 C55.2 D5.C J37.5 J37.6 J38.5 J38.6 J39.5 J39.6 J40.1 J41.GND J41.GNDBREAK J42.3 J42.5 J42.7 J42.9 J43.5 J43.6 S5.3 TP20.P$1 U17.A1 U17.A2 U17.A3 U17.A4 U17.A5 U17.A6 U18.6 U18.PAD U19.1 U19.4 U19.5 U19.PAD U20.9 U20.24 U20.34 U20.EP
GND5: C56.2 C57.2 C58.2 C59.2 C60.2 C61.2 C62.2 C63.2 C64.2 C65.2 C66.2 D6.C J46.5 J46.6 J47.5 J47.6 J48.5 J48.6 J49.1 J50.GND J50.GNDBREAK J51.3 J51.5 J51.7 J51.9 J52.5 J52.6 S6.3 TP24.P$1 U21.A1 U21.A2 U21.A3 U21.A4 U21.A5 U21.A6 U22.6 U22.PAD U23.1 U23.4 U23.5 U23.PAD U24.9 U24.24 U24.34 U24.EP
N$1: C7.1 U1.31
N$2: C6.1 U1.40
N$3: C4.1 C5.1 R3.1 U1.33
N$4: L1.P$1 U2.7
N$5: L2.P$1 U7.7
N$6: R4.1 U1.18
N$7: R5.1 U1.19
N$8: D1.A R2.2
N$9: C14.1 U8.31
N$10: C16.1 C19.1 R6.1 U8.33
N$11: C17.1 U8.40
N$12: R8.1 U8.18
N$13: R9.1 U8.19
N$14: D2.A R10.2
N$15: L3.P$1 U11.7
N$16: C25.1 U12.31
N$17: C27.1 C30.1 R11.1 U12.33
N$18: C28.1 U12.40
N$19: R13.1 U12.18
N$20: R14.1 U12.19
N$21: D3.A R15.2
N$22: L4.P$1 U15.7
N$23: C36.1 U16.31
N$24: C38.1 C41.1 R16.1 U16.33
N$25: C39.1 U16.40
N$26: R18.1 U16.18
N$27: R19.1 U16.19
N$28: D4.A R20.2
N$29: L5.P$1 U19.7
N$30: C47.1 U20.31
N$31: C49.1 C52.1 R21.1 U20.33
N$32: C50.1 U20.40
N$33: R23.1 U20.18
N$34: R24.1 U20.19
N$35: D5.A R25.2
N$36: L6.P$1 U23.7
N$37: C58.1 U24.31
N$38: C60.1 C63.1 R26.1 U24.33
N$39: C61.1 U24.40
N$40: R28.1 U24.18
N$41: R29.1 U24.19
N$42: D6.A R30.2
P2.0: U1.1 U4.11
P2.1: U1.2 U4.10
P2.2: U1.3 U4.9
P2.3: U1.4 U4.8
P2.4: U1.5 U4.7
P2.5: U6.10 U8.2
P2.6: U6.9 U8.3
P2.7: U6.8 U8.4
P2.8: U6.7 U8.5
P2.9: U6.11 U8.1
P2.10: U10.10 U12.2
P2.11: U10.9 U12.3
P2.12: U10.8 U12.4
P2.13: U10.7 U12.5
P2.14: U10.11 U12.1
P2.15: U14.10 U16.2
P2.16: U14.9 U16.3
P2.17: U14.8 U16.4
P2.18: U14.7 U16.5
P2.19: U14.11 U16.1
P2.20: U18.10 U20.2
P2.21: U18.9 U20.3
P2.22: U18.8 U20.4
P2.23: U18.7 U20.5
P2.24: U18.11 U20.1
P2.25: U22.10 U24.2
P2.26: U22.9 U24.3
P2.27: U22.8 U24.4
P2.28: U22.7 U24.5
P2.29: U22.11 U24.1
P3.1: J15.2 TP5.P$1 U8.12
P3.2: J2.2 TP1.P$1 U1.12
P3.3: J2.4 TP2.P$1 U1.13
P3.4: J15.4 TP6.P$1 U8.13
P3.5: J24.2 TP9.P$1 U12.12
P3.6: J24.4 TP10.P$1 U12.13
P3.7: J33.2 TP13.P$1 U16.12
P3.8: J33.4 TP14.P$1 U16.13
P3.9: J42.2 TP17.P$1 U20.12
P3.10: J42.4 TP18.P$1 U20.13
P3.11: J51.2 TP21.P$1 U24.12
P3.12: J51.4 TP22.P$1 U24.13
SCL: J3.4 U1.26 U3.A8
SCL1: J13.4 U5.A8 U8.26
SCL2: J22.4 U9.A8 U12.26
SCL3: J31.4 U13.A8 U16.26
SCL4: J40.4 U17.A8 U20.26
SCL5: J49.4 U21.A8 U24.26
SDA: J3.3 U1.27 U3.A7
SDA1: J13.3 U5.A7 U8.27
SDA2: J22.3 U9.A7 U12.27
SDA3: J31.3 U13.A7 U16.27
SDA4: J40.3 U17.A7 U20.27
SDA5: J49.3 U21.A7 U24.27
SERVO_1: J16.2 U5.A15
SERVO_2: J16.1 U5.A16
SERVO_3: J25.2 U9.A15
SERVO_4: J25.1 U9.A16
SERVO_5: J34.2 U13.A15
SERVO_6: J34.1 U13.A16
SERVO_7: J43.2 U17.A15
SERVO_8: J43.1 U17.A16
SERVO_9: J52.2 U21.A15
SERVO_10: J52.1 U21.A16
SERVO_15: J9.1 U3.A16
SERVO_16: J9.2 U3.A15
SLED: R2.1 U1.14
SLED1: R10.1 U8.14
SLED2: R15.1 U12.14
SLED3: R20.1 U16.14
SLED4: R25.1 U20.14
SLED5: R30.1 U24.14
U2.1: S2.2 U8.6
U2.2: S3.2 U12.6
U2.3: S4.2 U16.6
U2.4: S5.2 U20.6
U2.5: S1.2 U1.6
U2.6: S6.2 U24.6
VCC: C3.1 C10.1 C11.1 J1.PWR J9.3 J9.4 U2.2 U2.3 U4.1
VCC1: C12.1 C21.1 C22.1 J14.PWR J16.3 J16.4 U6.1 U7.2 U7.3
VCC2: C23.1 C32.1 C33.1 J23.PWR J25.3 J25.4 U10.1 U11.2 U11.3
VCC3: C34.1 C43.1 C44.1 J32.PWR J34.3 J34.4 U14.1 U15.2 U15.3
VCC4: C45.1 C54.1 C55.1 J41.PWR J43.3 J43.4 U18.1 U19.2 U19.3
VCC5: C56.1 C65.1 C66.1 J50.PWR J52.3 J52.4 U22.1 U23.2 U23.3
VDDD: C1.1 C2.1 R1.1 U1.32
VDDD1: C15.1 C18.1 R7.1 U8.32
VDDD2: C26.1 C29.1 R12.1 U12.32
VDDD3: C37.1 C40.1 R17.1 U16.32
VDDD4: C48.1 C51.1 R22.1 U20.32
VDDD5: C59.1 C62.1 R27.1 U24.32